# Altium PCB PCB_A.PcbDoc
Units mm, origin at the board's own origin, x right, y up, seen from the top; angles counter-clockwise.
Board outline 300 x 100 mm, 2 copper layers (Component Side, Bottom Layer), stack 2.071 mm thick; 91 components, 63 nets, 222 pads, 0 vias.
Unrouted connection lines stored in the file: 109.
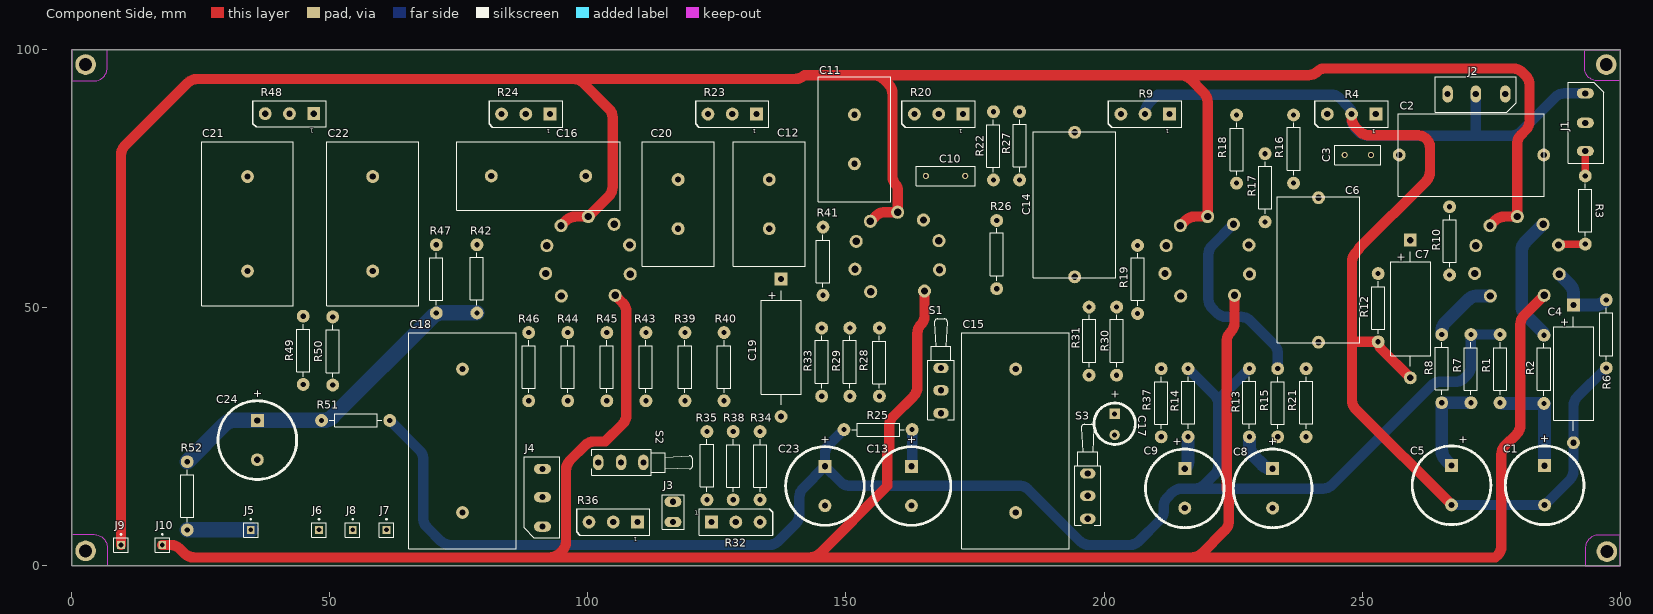
[diagram p0: Component Side view]
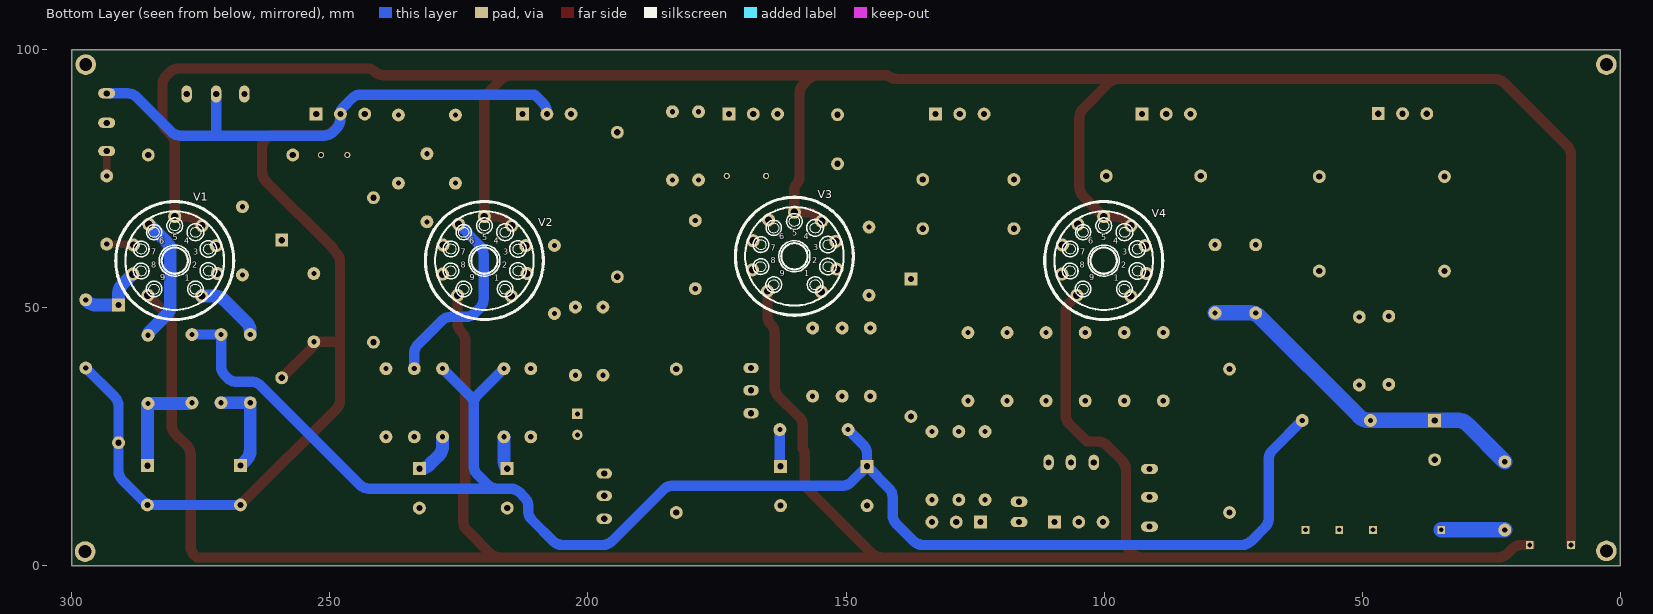
[diagram p1: Bottom Layer view, seen from below]

## Layer stack, top to bottom
Top Solder: solder mask 0.0102, Solder Resist, Dk 3.5
Component Side: signal copper 0.0356
Dielectric 1: core 2, FR-4, Dk 4.2
Bottom Layer: signal copper 0.0356
Solder Side: solder mask 0.0102, Solder Resist, Dk 3.5

## Board outline
0,100 0,0 300,0 300,100

## Design rules (kind name [scope] priority, off if disabled: settings)
Clearance [All] p1: gap=1.5
DiffPairsRouting [All] p1: maxlimit=2 minlimit=1 mostfreqgap=1.5 toplayer_minwidth=1 toplayer_maxwidth=3.8 toplayer_prefwidth=2 bottomlayer_minwidth=1 bottomlayer_maxwidth=3.8 bottomlayer_prefwidth=2 maxuncoupledlength=12.7
Height [All] p1: minheight=0 maxheight=30 prefheight=12.7
PlaneConnect [All] p1: planeconnectstyle=Relief reliefexpansion=0.8 reliefentries=4 reliefconductorwidth=1 reliefairgap=0.5
PolygonConnect [All] p1: connectstyle=Relief reliefconductorwidth=0.5 reliefentries=2 polygonreliefangle="90 Angle" airgapwidth=0.254
RoutingCorners [All] p1: cornerstyle=Round minsetback=2.54 maxsetback=2.54
RoutingTopology [All] p1: topology=Starburst
RoutingVias [All] p1: holewidth=1 width=3 viastyle="Through Hole" minholewidth=1 minwidth=3 maxholewidth=2.5 maxwidth=3
SolderMaskExpansion [All] p1: expansion=0.2
Width [All] p1: maxlimit=3.8 minlimit=1 preferedwidth=2
24 further rules are at their usual default settings.

## Classes and differential pairs
net class preamp_gain_stage_2_Nets: GND NetC8_1 NetC9_1 NetC10_1 NetC10_2 NetC11_1 NetC11_2 NetC12_2 NetR15_2 NetR16_2 NetR17_2 NetR21_1 NetR23_1 NetR24_1 PRE_CH1_BRIGHT PRE_CH2_NORMAL PRE_STAGE_2_OUT VD VP
net class preamp_chanel2_normal_Nets: GND NetC5_1 NetC6_1 NetC6_2 NetC7_1 NetJ2_1 NetR10_1 PRE_CH2_NORMAL VP
net class preamp_chanel1_bright_Nets: GND NetC1_1 NetC2_1 NetC2_2 NetC4_1 NetJ1_1 NetR3_1 PRE_CH1_BRIGHT VP
net class fxloop_Nets: GND "LOOP OUT" NetC13_1 NetC14_1 NetC14_2 NetC15_1 NetC15_2 NetC16_1 NetC16_2 NetC17_1 NetC18_1 NetC18_2 NetC19_1 NetJ3_1 NetJ4_1 NetR28_1 NetR32_3 NetR35_2 NetR36_3 NetR38_2 PRE_STAGE_2_OUT VP
component class preamp_gain_stage_2: C8 C9 C10 C11 C12 C23 R13 R14 R15 R16 R17 R18 R19 R20 R21 R22 R23 R24 R51 V2
component class preamp_chanel2_normal: C5 C6 C7 J2 R7 R8 R9 R10 R11 R12 V1
component class preamp_chanel1_bright: C1 C2 C3 C4 J1 R1 R2 R3 R4 R5 R6
component class poweramp_phase_splitter: C20 C21 C22 C24 J5 J6 J7 J8 R42 R43 R44 R45 R46 R47 R48 R49 R50 R52 V4
component class fxloop: C13 C14 C15 C16 C17 C18 C19 J3 J4 R25 R26 R27 R28 R29 R30 R31 R32 R33 R34 R35 R36 R37 R38 R39 R40 R41 S1 S2 S3 V3
net class Undefined: NetC18_1
component class heaters: J9 J10

## Components (designator, comment, footprint, x,y, rotation, side; value= is the part's Value field where it differs from the comment)
C1 "Cap Pol Rad" RAD-POL-7.6-15 285.369,15.621 r90 top
C2 "Polyester Film" ORANGE-DROP-100nF 266.192,79.629 r180 top
C3 "Ceramic Cap" RAD-0.2 249.174,79.629 r180 top
C4 "Cap Pol Axial" AXIAL-POL-30MM 290.957,37.211 r270 top
C5 "Cap Pol Rad" RAD-POL-7.6-15 267.335,15.625 r90 top
C6 "Orange Drop Capacitor" ORANGE-DROP-100nF 241.554,62.357 r90 top
C7 "Cap Pol Axial" AXIAL-POL-30MM 259.334,49.784 r270 top
C8 "Cap Pol Rad" RAD-POL-7.6-15 232.664,15.035 r90 top
C9 "Cap Pol Rad" RAD-POL-7.6-15 215.646,15.035 r90 top
C10 "Cap" RAD-0.3 169.291,75.565 r180 top
C11 "Orange Drop Capacitor" ORANGE-DROP-22nF-600V 151.638,82.677 r90 top
C12 "Orange Drop Capacitor" ORANGE-DROP-22nF-600V 135.128,70.104 r90 top
C13 "Cap Pol Rad" RAD-POL-7.6-15 162.687,15.494 r90 top
C14 "Orange Drop Capacitor" ORANGE-DROP-100nF 194.31,65.024 r270 top
C15 "Orange Drop Capacitor" ORANGE-DROP-470-nF-400V 182.88,24.257 r270 top
C16 "Orange Drop Capacitor" ORANGE-DROP-47nF-600V 90.424,75.565 r180 top
C17 "Cap Pol Radial Vishay 22uF 100V" RAD-POL-16X20X7.5 202.057,27.559 r90 top
C18 "Orange Drop Capacitor" ORANGE-DROP-470-nF-400V 75.692,24.257 r90 top
C19 "Cap Pol Axial" AXIAL-POL-30MM 137.414,42.291 r270 top
C20 "Orange Drop Capacitor" ORANGE-DROP-22nF-600V 117.475,70.104 r90 top
C21 "Orange Drop Capacitor" ORANGE-DROP-100nF-600V 34.036,66.294 r270 top
C22 "Orange Drop Capacitor" ORANGE-DROP-100nF-600V 58.293,66.294 r90 top
C23 "Cap Pol Rad" RAD-POL-7.6-15 145.923,15.494 r90 top
C24 "Cap Pol Rad" RAD-POL-7.6-15 35.941,24.384 r90 top
J1 "Jack P10 Stereo" JACK-STEREO-3PAD 293.243,85.852 r270 top
J2 "Jack P10 Stereo" JACK-STEREO-3PAD 272.034,91.44 r180 top
J3 "Jack Mono" JACK-MONO-PCB-MINI 116.459,10.414 r90 top
J4 "Jack P10 Stereo" JACK-STEREO-3PAD 91.186,13.335 r90 top
J5 "FROM POWER SUPPLY" PIN1 34.671,6.985 r0 top
J6 "OT GND Wire" PIN1 47.879,6.985 r0 top
J7 "TO_PA_COUPLING_CAP_A" PIN1 60.96,6.985 r0 top
J8 "TO_PA_COUPLING_CAP_B" PIN1 54.419,6.985 r0 top
J9 "Heater B" PIN1 9.525,4.064 r0 top
J10 "Heater A" PIN1 17.526,4.064 r0 top
R1 "Metal Film Resistor 1/2W" AXIAL-0.6 276.733,38.227 r90 top
R2 "Metal Film Resistor 1/2W" AXIAL-0.6 285.242,38.1 r270 top
R3 "Metal Film Resistor 1/2W" AXIAL-0.6 293.243,68.961 r90 top
R4 "ALPHA Potentiometer" "pot_alpha - 2.54mm" 247.958,87.555 r180 top
R6 "Metal Film Resistor 1/2W" AXIAL-0.6 297.307,44.958 r90 top
R7 "Metal Film Resistor 1/2W" AXIAL-0.6 271.082,38.227 r90 top
R8 "Metal Film Resistor 1/2W" AXIAL-0.6 265.43,38.227 r270 top
R9 "ALPHA Potentiometer" "pot_alpha - 2.54mm" 207.958,87.555 r180 top
R10 "Metal Film Resistor 1/2W" AXIAL-0.6 266.954,62.992 r90 top
R12 "Metal Film Resistor 1/2W" AXIAL-0.6 253.111,50.038 r90 top
R13 "Metal Film Resistor 1/2W" AXIAL-0.6 228.155,31.623 r270 top
R14 "Metal Film Resistor 1/2W" AXIAL-0.6 216.281,31.623 r270 top
R15 "Metal Film Resistor 1/2W" AXIAL-0.6 233.648,31.623 r90 top
R16 "Metal Film Resistor 1/2W" AXIAL-0.6 236.728,80.772 r270 top
R17 "Metal Film Resistor 1/2W" AXIAL-0.6 231.203,73.279 r270 top
R18 "Metal Film Resistor 1/2W" AXIAL-0.6 225.679,80.772 r90 top
R19 "Metal Film Resistor 1/2W" AXIAL-0.6 206.502,55.499 r270 top
R20 "ALPHA Potentiometer" "pot_alpha - 2.54mm" 167.958,87.555 r180 top
R21 "Metal Film Resistor 1/2W" AXIAL-0.6 239.141,31.623 r270 top
R22 "Metal Film Resistor 1/2W" AXIAL-0.6 178.562,81.407 r90 top
R23 "ALPHA Potentiometer" "pot_alpha - 2.54mm" 127.958,87.555 r180 top
R24 "ALPHA Potentiometer" "pot_alpha - 2.54mm" 87.958,87.555 r180 top
R25 "Metal Film Resistor 1/2W" AXIAL-0.6 156.21,26.416 r180 top
R26 "Metal Film Resistor 1/2W" AXIAL-0.6 179.197,60.325 r270 top
R27 "Metal Film Resistor 1/2W" AXIAL-0.6 183.642,81.407 r270 top
R28 "Metal Film Resistor 1/2W" AXIAL-0.6 156.464,39.497 r90 top
R29 "Metal Film Resistor 1/2W" AXIAL-0.6 150.749,39.497 r270 top
R30 "Metal Film Resistor 1/2W" AXIAL-0.6 202.438,43.561 r270 top
R31 "Metal Film Resistor 1/2W" AXIAL-0.6 197.104,43.561 r270 top
R32 "ALPHA Potentiometer" "pot_alpha - 2.54mm" 128.651,8.509 r0 top
R33 "Metal Film Resistor 1/2W" AXIAL-0.6 145.288,39.497 r270 top
R34 "Metal Film Resistor 1/2W" AXIAL-0.6 133.35,19.431 r90 top
R35 "Metal Film Resistor 1/2W" AXIAL-0.6 123.063,19.431 r270 top
R36 "ALPHA Potentiometer" "pot_alpha - 2.54mm" 104.902,8.509 r180 top
R37 "Metal Film Resistor 1/2W" AXIAL-0.6 211.074,31.623 r90 top
R38 "Metal Film Resistor 1/2W" AXIAL-0.6 128.143,19.431 r90 top
R39 "Metal Film Resistor 1/2W" AXIAL-0.6 118.796,38.608 r90 top
R40 "Metal Film Resistor 1/2W" AXIAL-0.6 126.365,38.608 r90 top
R41 "Metal Film Resistor 1/2W" AXIAL-0.6 145.542,59.055 r90 top
R42 "Metal Film Resistor 1/2W" AXIAL-0.6 78.486,55.626 r270 top
R43 "Metal Film Resistor 1/2W" AXIAL-0.6 111.227,38.608 r90 top
R44 "Metal Film Resistor 1/2W" AXIAL-0.6 96.088,38.608 r90 top
R45 "Metal Film Resistor 1/2W" AXIAL-0.6 103.657,38.608 r90 top
R46 "Metal Film Resistor 1/2W" AXIAL-0.6 88.519,38.608 r90 top
R47 "Metal Film Resistor 1/2W" AXIAL-0.6 70.612,55.626 r90 top
R48 "ALPHA Potentiometer" "pot_alpha - 2.54mm" 42.164,87.63 r180 top
R49 "Metal Film Resistor 1/2W" AXIAL-0.6 44.831,41.783 r90 top
R50 "Metal Film Resistor 1/2W" AXIAL-0.6 50.546,41.656 r90 top
R51 "Metal Film Resistor 1W" AXIAL-0.6 54.991,28.194 r180 top
R52 "Metal Film Resistor 1W" AXIAL-0.6 22.352,13.589 r90 top
S1 "SW-SPDT" SPDT 168.402,34.671 r90 top
S2 "SW-SPDT" SPDT 107.061,20.066 r0 top
S3 "SW-SPDT" SPDT 196.85,14.224 r90 top
V1 "12AX7-P" NOVAL#1 280,60 r180 bottom locked
V2 "12AX7-P" NOVAL#1 220,60 r180 bottom
V3 "12AT7-P" NOVAL#2 160,60 r180 bottom locked
V4 "12AX7-P" NOVAL#1 100,60 r180 bottom locked

## Footprints (in the part's own frame and the unit in brackets; to place one, negate y for a bottom-side part, rotate by r counter-clockwise, add the part's x,y. Pads: shape width x height; smd on the part's side, far side on the other; paste and mask are expansions set on the pad)
AXIAL-0.6 [mm] "Axial Device, Thru-Hole; 2 Leads; 0.6 in Pin Spacing"
  round 2.5 hole 1: 1(-6.604,0) 2(6.604,0)
  silkscreen extent -5.08,-1.27 5.08,1.27, body extent -6.85,-1.5 6.94,1.5, height 3.5
AXIAL-POL-30MM [mm] "Axial Eletrolitic Capacitor Thru-Hole; 2 Leads; 30.0mm Pin Spacing"
  rect 2.5x2.5 hole 1.2: 1(-13.335,0)
  round 2.5 hole 1.2: 2(13.335,0)
  silkscreen extent -11.05,-3.81 11.05,3.94, body extent -13.9,-4 13.9,4, height 9
JACK-MONO-PCB-MINI [mm] "Connector; Jack Socket, 1/4\" [6.5mm], Thru-Hole, 2 Position, Vertical, Body 15.7 x 15.7 x 31 mm (WxTxH)"
  oval 2x3.3 hole 1.2: 1(2.032,0) 2(-1.905,0)
  silkscreen extent -3.3,-2.16 3.43,2.03
JACK-STEREO-3PAD [mm] "Connector; Jack Socket, 1/4\" [6.5mm], Thru-Hole, 3 Position, Vertical, Body 15.7 x 15.7 x 31 mm (WxTxH)"
  oval 2x3.3 hole 1.2: 1(5.461,0) 2(0,0) 5(-5.715,0)
  silkscreen extent -7.85,-3.3 7.85,3.56
NOVAL#1 [mil] "9 Pin small tube pcb socket"
  round 100 hole 56: 1(202.48,-303) 2(322.48,-130.8) 3(313.48,81) 4(205.48,234) 5(-2.52,303) 6(-199.53,244) 7(-317.64,86) 8(-322.48,-135.8) 9(-207.52,-298)
  silkscreen extent -453,-483 447,417, body extent -597,-625 593,570, height 505
NOVAL#2 [mil] "9 Pin small tube pcb socket"
  round 100 hole 56: 1(205,-270) 2(325,-97.8) 3(316,114) 4(208,267) 5(0,336) 6(-197.01,277) 7(-315.12,119) 8(-319.96,-102.8) 9(-205,-265)
  silkscreen extent -450,-450 450,450, body extent -608,-605 602,606, height 465
ORANGE-DROP-22nF-600V [mm] "Orange Drop Capacitor 22nF WxLxH=31.0x11.20x12.7mm - Lead 18.30mm"
  round 2.5 hole 1.2: 1(-4.76,0) 2(4.76,0)
  silkscreen extent -12.06,-6.99 12.06,6.99, body extent -12.06,-6.98 12.07,6.99, height 15.98
ORANGE-DROP-47nF-600V [mm] "Orange Drop Capacitor 47nF WxLxH=31.8x13.20x14.2mm - Lead 18.30mm"
  round 2.5 hole 1.2: 1(-9.15,0) 2(9.15,0)
  silkscreen extent -15.88,-6.6 15.88,6.6, body extent -15.87,-6.6 15.93,6.6, height 15.6
ORANGE-DROP-100nF [mm] "Orange Drop Capacitor 100nF WxLxH=28x16x25 mm"
  round 2.5 hole 1.2: 1(-19,0) 2(9,0)
  silkscreen extent -19.13,-8 9.14,8, body extent -19.01,-8 9,8, height 21
ORANGE-DROP-100nF-600V [mm] "Orange Drop Capacitor 47nF WxLxH=31.8x18x19.2mm - Lead 18.30mm"
  round 2.5 hole 1.2: 1(-9.15,0) 2(9.15,0)
  silkscreen extent -15.88,-8.89 15.88,8.89, body extent -15.88,-9 15.92,9, height 22
ORANGE-DROP-470-nF-400V [mm] "Orange Drop Capacitor 470nF WxLxH=41.9x20.8x122.4mm - Lead 18.30mm"
  round 2.5 hole 1.2: 1(-13.9,0) 2(13.9,0)
  silkscreen extent -20.95,-10.41 20.96,10.41, body extent -20.95,-10.4 20.95,10.4, height 25.4
PIN1 [mm] "Connector; Plug"
  rect 1.5x1.5 hole 0.9: 1(0,0)
  silkscreen extent -1.4,-1.4 1.4,2.17
"pot_alpha - 2.54mm" [mm] "Thru-Hole; 3 Leads, 2.54mm min spacing"
  rect 2.5x2.5 hole 1.2: 1(-4.699,0)
  round 2.5 hole 1.2: 2(0,0) 3(4.699,0)
  silkscreen extent -7.11,-2.54 7.11,2.54
RAD-0.2 [mm] "Radial Cap, Thru-Hole; 2 Leads; 0.2 in Pin Spacing"
  round 1.2 hole 0.7: 1(-2.54,0) 2(2.54,0)
  silkscreen extent -4.44,-1.91 4.44,1.91
RAD-0.3 [mm] "Radial Cap, Thru-Hole; 2 Leads; 0.3 in Pin Spacing"
  round 1.2 hole 0.7: 1(-3.81,0) 2(3.81,0)
  silkscreen extent -5.71,-1.91 5.71,1.91
RAD-POL-7.6-15 [mm] "Polarized Capacitor (Radial); 2 Leads"
  rect 2.5x2.5 hole 1.2: 1(3.81,0)
  round 2.5 hole 1.2: 2(-3.81,0)
  silkscreen extent -7.62,-7.62 7.62,7.62, body extent -8.18,-8.22 8.25,8.22, height 27
RAD-POL-16X20X7.5 [mm] "Vishay 22uF 100V Polarized Capacitor (Radial); 2 Leads"
  rect 2x2 hole 1: 1(1.905,0)
  round 2 hole 1: 2(-2.159,0)
  silkscreen extent -4,-4 4,4, body extent -4,-3.99 4,3.99, height 13
SPDT [mm] "Switch SPDT; 3 Leads"
  oval 2x3 hole 1.2: 1(3.683,0) 2(-0.635,0) 3(-5.08,0)
  silkscreen extent -6.35,-2.54 13.21,2.54

## Part data
C1 C5 C8 C9 C13 C23 C24: "Polarized Capacitor (Axial)"
C2: library part Cap-PFilm, "Capacitor"
C3: library part Cap-Ceramic-Small, "Capacitor"
C4 C7 C19: "Polarized Capacitor Axial"
C6 C11 C12 C20: library part Cap-Orange-DROP-22nF-600V, "Capacitor"
C10: "Capacitor"
C14: library part Cap-Orange-DROP_600V, "Capacitor"
C15 C18: library part Cap-Orange-DROP-470nF-400V, "Capacitor"
C16: library part Cap-Orange-DROP-47nF-600V, "Capacitor"
C17: "Vishay 22uF 100V Polarized Capacitor (Radial); 2 Leads"
C21 C22: library part Cap-Orange-DROP-100nF-600V, "Capacitor"
J1 J2 J4: "Jack Socket, 1/4\" [6.5mm], Thru-Hole, Vertical, 2-Conductor with Tip closed"
J3: library part "Jack Moto P10", "Jack Socket, Thru-Hole, Vertical, 2-Conductor Open Circuit"
J5 J7 J8 J9 J10: library part Socket, "Socket"
J6: library part Socket, "FromOTGroundWire"
R1 R2 R3 R6 R7 R8 R10 R12 R13 R14 R15 R16 R17 R18 R19 R21 R22 R25 R26 R27 R28 R29 R30 R31 R33 R34 R35 R37 R38 R39 R40 R41 R42 R43 R44 R45 R46 R47 R49 R50: library part "Res Metal Film 1/2W", "Semiconductor Resistor"
R4 R9 R20 R23 R24 R32 R36 R48: library part alpha-pot, "Potentiometer"
R51 R52: library part "Res Wire Wound 1W", "Semiconductor Resistor"
S1 S2 S3: "SPDT Subminiature Toggle Switch, Right Angle Mounting, Vertical Actuation"

## Free pads (board coordinates)
  round 4 hole 2.5: 0(2.667,2.921) 0(2.667,97.155) 0(297.307,97.155) 0(297.434,2.794)

## Nets (pads, with @x,y where several pads share a name; then routed paths per layer and width w, separated by ;. In a path a pad name is that pad's centre, name@x,y a point inside that pad or via, vN(x,y) a via of type N, cw(c..) or ccw(c..) an arc to the next point about the centre after c; other vN are vias at no path point)
"8 OHM OUPUT WIRE": R50.1
GND: C1.2 C4.2 C5.2 C7.2 C8.2 C9.2 C13.2 C17.2 C19.2 C23.2 C24.2 J1.2 J1.5 J2.2 J2.5 J3.2 J4.2 J4.5 J6.1 R4.2 R6.1 R9.2 R12.1 R19.2 R21.2 R24.2 R31.2 R32.2 R36.2 R37.2 R40.1 R41.1 R48.2 R49.1 S1.3 | length 269.9
  Component Side w2: R4.2 247.958,86.85 ccw(c250.498,86.85) 248.702,85.054 249.573,84.183 ccw(c251.369,85.979) 251.369,83.439 260.695,83.439 cw(c260.695,80.899) 262.491,82.695 cw(c260.914,81.118) 263.144,81.118 263.144,76.363 cw(c260.604,76.363) 262.4,74.567 249.481,61.648 ccw(c249.914,61.214) 249.301,61.214 248.775,60.688 ccw(c250.571,58.892) 248.031,58.892 248.031,43.053 ; C7.2 253.65,42.133 cw(c254.951,43.434) R12.1 248.951,43.434 ccw(c248.951,42.133) 248.031,43.053 ; C5.2 248.775,30.375 cw(c250.571,32.171) 248.031,32.171 248.031,43.053
  Bottom Layer w1: J1.5 cw(c293.243,90.954) J1.5@293.677,91.387
  Bottom Layer w2: R9.2 207.958,87.84 cw(c210.498,87.84) 208.702,89.636 210.324,91.258 cw(c210.439,91.142) 210.439,91.305 244.103,91.305 cw(c244.103,89.163) 245.618,90.678 247.405,88.891 cw(c246.069,87.555) R4.2 247.958,86.596 ccw(c250.498,86.596) 248.702,84.8 249.379,84.123 ccw(c251.175,85.919) 251.175,83.379 272.034,83.379 ; C5.2 285.365,11.815 C1.2 290.213,16.655 ccw(c288.417,18.451) 290.957,18.451 C4.2 290.957,30.952 cw(c293.497,30.952) 291.701,32.748 R6.1 ; J2.2 272.034,83.379 ; J1.5 289.215,91.567 ccw(c289.215,89.027) 287.419,90.823 280.719,84.123 cw(c278.923,85.919) 278.923,83.379 272.034,83.379
"LOOP OUT": C20.1 S3.2
NetC1_1: C1.1 R1.1 R2.2 | length 20.6
  Bottom Layer w2.5: R1.1 ccw(c277.04,31.93) 277.04,31.496 R2.2 cw(c284.935,31.189) 285.369,31.189 C1.1
NetC2_1: C2.1 R2.1 V1.6 | length 24.7
  Bottom Layer w2.5: V1.6 281.668,62.798 ccw(c283.464,61.001) 280.924,61.001 280.924,50.455 ccw(c283.464,50.455) 281.668,48.659 284.973,45.354 cw(c284.322,44.704) R2.1
NetC2_2: C2.2 C3.1 R4.1
NetC4_1: C4.1 R6.2 V1.8 | length 13.7
  Bottom Layer w2.5: V1.8 290.213,54.529 cw(c288.417,52.733) 290.957,52.733 C4.1 295.239,50.546 ccw(c295.239,53.086) 297.035,51.29 R6.2
NetC5_1: C5.1 R7.1 R8.2 | length 18.5
  Bottom Layer w2.5: C5.1 266.174,20.596 cw(c267.97,22.392) 265.43,22.392 R8.2 R7.1
NetC6_1: C6.1 R8.1 V1.1 | length 13.3
  Bottom Layer w2.5: R8.1 265.43,45.43 cw(c267.97,45.43) 266.174,47.226 270.508,51.56 cw(c272.304,49.764) 272.304,52.304 V1.1
NetC6_2: C6.2 R9.1
NetC7_1: C7.1 R12.2 V1.3
NetC8_1: C8.1 R13.2 R15.1 | length 8.5
  Bottom Layer w2.5: R13.2 228.155,23.214 ccw(c230.695,23.214) 228.899,21.418 230.728,19.589 ccw(c232.524,21.385) 232.524,18.845 C8.1
NetC9_1: C9.1 R14.2 V2.1 | length 6.3
  Bottom Layer w2.5: C9.1 ccw(c214.113,20.378) 216.281,20.378 R14.2
NetC10_1: C10.1 R19.1 R22.1 V2.3
NetC10_2: C10.2 R20.1
NetC11_1: C11.1 C12.1 R22.2
NetC11_2: C11.2 R20.2 R23.3
NetC12_2: C12.2 R23.2 R24.3
NetC13_1: C13.1 R25.1 R26.1 R33.2 V3.6 | length 7.1
  Bottom Layer w2: C13.1 ccw(c162.38,19.611) 162.814,19.611 R25.1
NetC14_1: C14.1 R27.1
NetC14_2: C14.2 R30.1 V3.7
NetC15_1: C15.1 R31.1 V3.8
NetC15_2: C15.2 R32.1 S1.1
NetC16_1: C16.1 R33.1 V3.1
NetC16_2: C16.2 R29.2 S3.3
NetC17_1: C17.1 R26.2 R30.2 R37.1
NetC18_1: C18.1 R28.2 R29.1 R39.2 S2.3
NetC18_2: C18.2 R40.2 V3.2
NetC19_1: C19.1 R41.2 V3.3
NetC20_2: C20.2 R43.1 V4.7
NetC21_1: C21.1 R48.3
NetC21_2: C21.2 C22.1 R44.2 R49.2 R50.2
NetC22_2: C22.2 R46.2 V4.2
NetJ1_1: J1.1 R3.2 | length 4.8
  Component Side w1.5: R3.2 J1.1
NetJ2_1: J2.1 R10.2
NetJ3_1: J3.1 R34.2
NetJ4_1: J4.1 R35.1
NetJ5_1: J5.1 R52.1 | length 12.3
  Bottom Layer w3: R52.1 J5.1
NetJ7_1: J7.1 R42.1 V4.6
NetJ8_1: J8.1 R47.2 V4.1
NetJ9_1: J9.1 V1.4 V1.5 V2.4 V2.5 V3.4 V3.5 V4.4 V4.5 | length 497.8
  Component Side w2: J9.1 9.525,79.593 cw(c12.065,79.593) 10.269,81.389 22.497,93.617 cw(c24.293,91.821) 24.293,94.361 97.246,94.361 ; V4.4 95.789,66.952 cw(c97.586,65.156) 97.586,67.696 V4.5 104.031,71.663 ccw(c102.235,73.459) 104.775,73.459 104.775,86.832 ccw(c102.235,86.832) 104.031,88.628 99.042,93.617 ccw(c97.246,91.821) 97.246,94.361 ; V3.4 155.725,67.79 cw(c157.522,65.994) 157.522,68.534 V3.5 160,73.042 ccw(c158.767,73.042) 159.639,73.914 cw(c161.172,75.447) 159.004,75.447 159.004,91.531 ccw(c156.464,91.531) 158.26,93.327 157.226,94.361 ccw(c155.43,92.565) 155.43,95.105 ; V2.4 215.789,66.952 cw(c217.586,65.156) 217.586,67.696 V2.5 220.064,89.907 ccw(c217.524,89.907) 219.32,91.703 216.662,94.361 ccw(c214.866,92.565) 214.866,95.105 ; V1.4 275.789,66.952 cw(c277.586,65.156) 277.586,67.696 V1.5 280.064,81.781 cw(c282.604,81.781) 280.808,83.577 281.704,84.473 ccw(c279.908,86.269) 282.448,86.269 282.448,93.182 ccw(c279.908,93.182) 281.704,94.978 281.033,95.649 ccw(c279.237,93.853) 279.237,96.393 242.704,96.393 ccw(c242.704,94.535) 241.391,95.849 cw(c239.595,97.645) 239.595,95.105 214.866,95.105 ; 97.246,94.361 140.172,94.361 ccw(c140.172,96.901) 141.968,95.105 155.43,95.105 ; 155.43,95.105 214.866,95.105
NetJ10_1: J10.1 V1.9 V2.9 V3.9 V4.9 | length 488.3
  Component Side w2: J10.1 19.141,4.064 cw(c19.141,1.524) 20.937,3.32 21.862,2.395 ccw(c23.658,4.191) 23.658,1.651 92.674,1.651 ; V4.9 106.698,51.004 cw(c104.902,49.208) 107.442,49.208 107.442,29.282 cw(c104.902,29.282) 106.698,27.486 103.342,24.13 101.255,24.13 ccw(c101.255,21.59) 99.459,23.386 96.502,20.429 ccw(c98.298,18.633) 95.758,18.633 95.758,4.735 cw(c93.218,4.735) 95.014,2.939 94.47,2.395 cw(c92.674,4.191) 92.674,1.651 ; V3.9 165.207,48.373 cw(c163.046,48.373) 164.574,46.845 ccw(c166.37,45.049) 163.83,45.049 163.83,34.707 cw(c161.29,34.707) 163.086,32.911 159.131,28.956 ccw(c160.927,27.16) 158.387,27.16 158.387,22.751 ccw(c159.35,21.788) 157.988,21.788 157.988,15.494 144.889,2.395 cw(c143.093,4.191) 143.093,1.651 ; V2.9 225.271,47.126 cw(c222.731,47.126) 224.527,45.33 224.518,45.321 ccw(c226.314,43.525) 223.774,43.525 223.774,14.986 cw(c222.854,14.066) 224.155,14.066 224.155,8.672 cw(c221.615,8.672) 223.411,6.876 218.93,2.395 cw(c217.134,4.191) 217.134,1.651 ; V1.9 281.414,48.574 ccw(c283.21,46.778) 280.67,46.778 280.67,27.341 cw(c278.13,27.341) 279.926,25.545 277.731,23.35 ccw(c279.527,21.554) 276.987,21.554 276.987,3.846 cw(c274.447,3.846) 276.243,2.05 275.844,1.651 217.134,1.651 ; 92.674,1.651 143.093,1.651 ; 143.093,1.651 217.134,1.651
NetR3_1: R3.1 V1.7 | length 5
  Component Side w1.5: V1.7@288.241,62.357 R3.1
NetR10_1: R10.1 V1.2
NetR15_2: R15.2 V2.2 V2.6 | length 37.9
  Bottom Layer w2: V2.6 220.962,62.092 ccw(c222.758,60.295) 220.218,60.295 220.218,51.725 ccw(c222.758,51.725) 220.962,49.929 221.887,49.004 ccw(c223.683,50.8) 223.683,48.26 226.532,48.26 cw(c226.532,45.72) 228.328,47.516 232.905,42.939 cw(c231.108,41.143) 233.648,41.143 R15.2
NetR16_2: R16.2 R17.1 R18.1
NetR17_2: R17.2 V2.7
NetR21_1: R21.1 V2.8
NetR23_1: R23.1
NetR24_1: R24.1
NetR28_1: R28.1 S1.2
NetR32_3: R32.3 R34.1
NetR35_2: R35.2 R36.1
NetR36_3: R36.3 R38.1 S2.1
NetR38_2: R38.2 R39.1 S2.2
NetR43_2: R43.2 R44.1 R45.2 R46.1
NetR45_1: R45.1 V4.3 V4.8
NetR48_1: R48.1
PRE_CH1_BRIGHT: C3.2 R4.3 R16.1
PRE_CH2_NORMAL: R9.3 R18.2
PRE_STAGE_2_OUT: R20.3 R27.2 S3.1
VD: C24.1 R42.2 R47.1 R51.2 R52.2 | length 67.7
  Bottom Layer w3: R52.2 29.609,27.45 cw(c31.405,25.654) 31.405,28.194 C24.1 R51.2 48.732,28.194 ccw(c48.732,30.734) 50.528,28.938 69.868,48.278 cw(c71.664,46.482) 71.664,49.022 R42.2
VP: C23.1 R1.2 R7.2 R13.1 R14.1 R25.2 R51.1 | length 315.4
  Bottom Layer w2: R51.1 67.328,22.461 cw(c65.532,20.665) 68.072,20.665 68.072,9.307 ccw(c70.612,9.307) 68.816,7.511 71.519,4.808 ccw(c73.315,6.604) 73.315,4.064 135.092,4.064 ccw(c135.092,6.604) 136.888,4.808 140.226,8.146 ccw(c138.43,9.942) 140.97,9.942 140.97,13.299 cw(c143.51,13.299) 141.714,15.095 C23.1 ; R25.2 146.667,23.477 ccw(c148.463,21.681) 145.923,21.681 C23.1 ; R14.1 221.379,33.129 cw(c219.583,31.333) 222.123,31.333 ; R13.1 222.732,32.804 ccw(c224.203,31.333) 222.123,31.333 ; R1.2 R7.2 271.082,38.708 cw(c268.542,38.708) 270.338,36.912 269.857,36.431 cw(c268.061,38.227) 268.061,35.687 265.212,35.687 ccw(c265.212,33.147) 263.416,34.943 244.203,15.73 cw(c242.407,17.526) 242.407,14.986 217.642,14.986 ; C23.1 148.929,16.298 ccw(c150.725,18.094) 150.725,15.554 183.546,15.554 cw(c183.546,13.014) 185.342,14.81 195.344,4.808 ccw(c197.14,6.604) 197.14,4.064 204.942,4.064 ccw(c204.942,6.604) 206.738,4.808 210.838,8.908 ccw(c209.042,10.704) 211.582,10.704 211.582,11.521 cw(c214.122,11.521) 212.326,13.317 213.251,14.242 cw(c215.047,12.446) 215.047,14.986 217.642,14.986 ; 217.642,14.986 ccw(c217.642,17.526) 219.438,15.73 221.379,17.671 ccw(c219.583,19.467) 222.123,19.467 222.123,31.333

## Keep-outs
Component Side:
  region: 0,6.096 4.318,6.096 cw(c4.318,3.556) 6.858,3.556 6.858,0 0,0
  region: 0,93.98 4.318,93.98 ccw(c4.318,96.52) 6.858,96.52 6.858,100 0,100
  region: 300,93.98 295.656,93.98 cw(c295.656,96.52) 293.116,96.52 293.116,100 300,100
  region: 300,5.969 295.783,5.969 ccw(c295.783,3.429) 293.243,3.429 293.243,0 300,0

## Text inside footprints (layer, text, board x,y; h text height)
C1: Top Overlay "+" at 286.106,23.753 h1.5 r90
C4: Top Overlay "+" at 288.544,48.133 h1.52 r270
C5: Top Overlay "+" at 270.256,23.626 h1.5 r90
C7: Top Overlay "+" at 256.921,60.706 h1.52 r270
C8: Top Overlay "+" at 233.401,23.167 h1.5 r90
C9: Top Overlay "+" at 214.884,23.241 h1.5 r90
C13: Top Overlay "+" at 163.424,23.626 h1.5 r90
C17: Top Overlay "+" at 202.819,32.385 h1.5 r90
C19: Top Overlay "+" at 135.001,53.213 h1.52 r270
C23: Top Overlay "+" at 146.66,23.626 h1.5 r90
C24: Top Overlay "+" at 36.678,32.516 h1.5 r90
R4: Top Overlay "1" at 252.657,84.634 h0.8 r180
R9: Top Overlay "1" at 212.657,84.634 h0.8 r180
R20: Top Overlay "1" at 172.657,84.634 h0.8 r180
R23: Top Overlay "1" at 132.657,84.634 h0.8 r180
R24: Top Overlay "1" at 92.657,84.634 h0.8 r180
R32: Top Overlay "1" at 120.65,9.906 h0.8
R36: Top Overlay "1" at 109.601,5.588 h0.8 r180
R48: Top Overlay "1" at 46.863,84.709 h0.8 r180
V1: Bottom Overlay "1" at 278.134,54.92 h1.97; Bottom Overlay "2" at 276.635,57.384 h1.97; Bottom Overlay "3" at 276.457,59.898 h1.97; Bottom Overlay "4" at 278.235,62.083 h1.97; Bottom Overlay "5" at 280.496,62.743 h1.97; Bottom Overlay "6" at 283.036,62.032 h1.97; Bottom Overlay "7" at 284.611,59.873 h1.97; Bottom Overlay "8" at 284.661,57.409 h1.97; Bottom Overlay "9" at 282.858,54.945 h1.97
V2: Bottom Overlay "1" at 218.134,54.92 h1.97; Bottom Overlay "2" at 216.635,57.384 h1.97; Bottom Overlay "3" at 216.457,59.898 h1.97; Bottom Overlay "4" at 218.235,62.083 h1.97; Bottom Overlay "5" at 220.496,62.743 h1.97; Bottom Overlay "6" at 223.036,62.032 h1.97; Bottom Overlay "7" at 224.611,59.873 h1.97; Bottom Overlay "8" at 224.661,57.409 h1.97; Bottom Overlay "9" at 222.858,54.945 h1.97
V3: Bottom Overlay "9" at 162.794,55.784 h1.97; Bottom Overlay "8" at 164.597,58.247 h1.97; Bottom Overlay "7" at 164.547,60.711 h1.97; Bottom Overlay "6" at 162.972,62.87 h1.97; Bottom Overlay "5" at 160.432,63.581 h1.97; Bottom Overlay "4" at 158.171,62.921 h1.97; Bottom Overlay "3" at 156.393,60.737 h1.97; Bottom Overlay "2" at 156.571,58.222 h1.97; Bottom Overlay "1" at 158.07,55.758 h1.97
V4: Bottom Overlay "9" at 102.858,54.945 h1.97; Bottom Overlay "8" at 104.661,57.409 h1.97; Bottom Overlay "7" at 104.611,59.873 h1.97; Bottom Overlay "6" at 103.036,62.032 h1.97; Bottom Overlay "5" at 100.496,62.743 h1.97; Bottom Overlay "4" at 98.235,62.083 h1.97; Bottom Overlay "3" at 96.457,59.898 h1.97; Bottom Overlay "2" at 96.635,57.384 h1.97; Bottom Overlay "1" at 98.134,54.92 h1.97